# Altium PCB 758721.097-1.PcbDoc
Units mm, origin at the board's own origin, x right, y up, seen from the top; angles counter-clockwise.
Board outline 65 x 20 mm, 2 copper layers (Top Layer, Bottom Layer), stack 1.571 mm thick; 12 components, 3 nets, 21 pads, 0 vias.
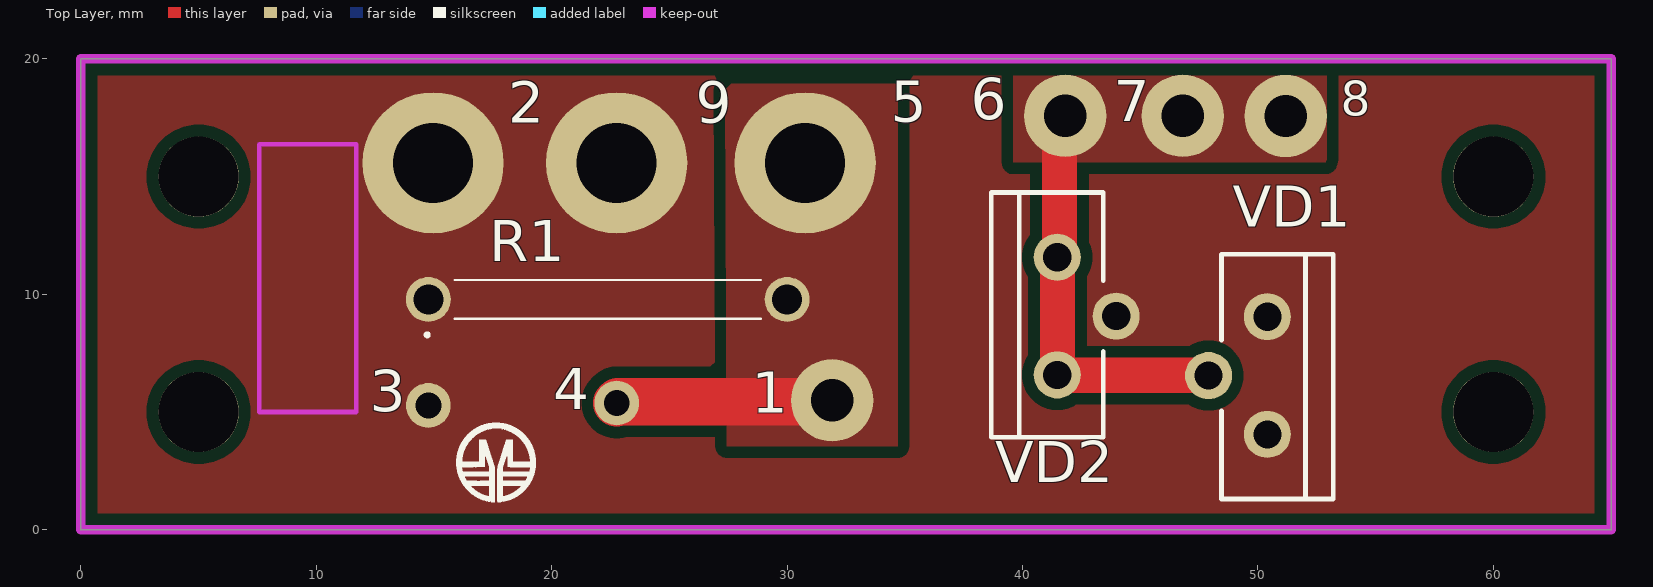
[diagram p0: Top Layer view]
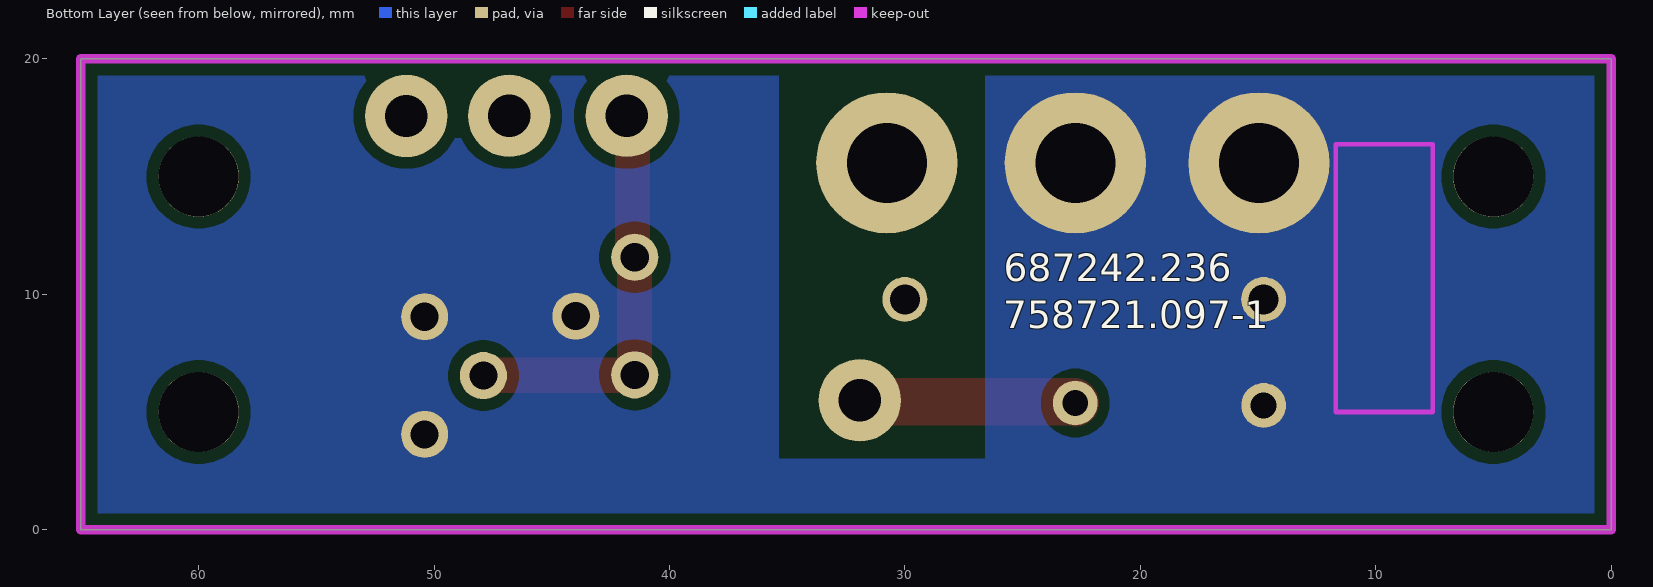
[diagram p1: Bottom Layer view, seen from below]
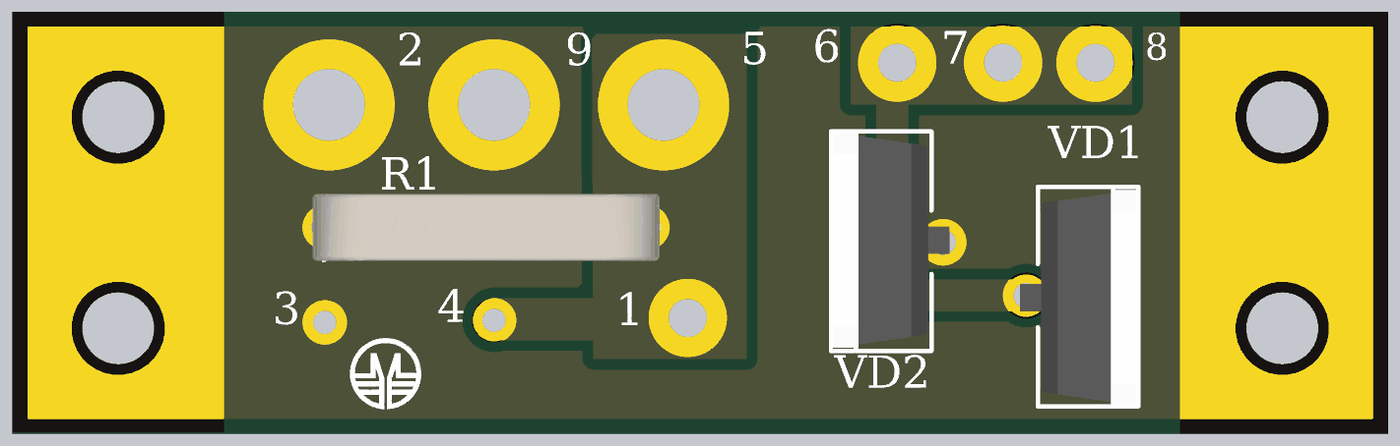
[diagram p2: 3D render of the assembled board from above, using the file's embedded part models]

## Layer stack, top to bottom
Top Solder: solder mask 0.0102, Solder Resist, Dk 3.5
Top Layer: signal copper 0.0356
Dielectric 1: dielectric 1.5, FR-4, Dk 4.8
Bottom Layer: signal copper 0.0356
Bottom Solder: solder mask 0.0102, Solder Resist, Dk 3.5

## Board outline
0,0 65,0 65,20 0,20

## Design rules (kind name [scope] priority, off if disabled: settings)
Clearance Clearance_2 [InNamedPolygon('Main_GND')] p1: gap=0.5 ignorepadtopadclearanceinfootprint=FALSE
Clearance Clearance_1 [InNamedPolygon('Main_GND')] p2: gap=0.5 ignorepadtopadclearanceinfootprint=FALSE
Clearance [All] p3: gap=0.254 ignorepadtopadclearanceinfootprint=FALSE
PolygonConnect PolygonConnect_1 [All vs IsNamedPolygon('Main_GND')] p1: connectstyle=Direct reliefconductorwidth=0.254 reliefentries=4 polygonreliefangle="90 Angle" airgapwidth=0.254
PolygonConnect [All] p2: connectstyle=Relief reliefconductorwidth=0.254 reliefentries=4 polygonreliefangle="90 Angle" airgapwidth=0.254
RoutingVias [All] p1: holewidth=0.711 width=1.27 viastyle="Through Hole" minholewidth=0.711 minwidth=1.27 maxholewidth=0.711 maxwidth=1.27
SolderMaskExpansion [All] p1: expansion=0.102 istentingtop=FALSE
SupplyNets "Schematic Supply Nets" [InNet('GND')] p1: voltage=0.000
Width [All] p1: maxlimit=0.254 minlimit=0.254 preferedwidth=0.254
30 further rules are at their usual default settings.

## Classes and differential pairs
component class УШЯИ.687242.236Э3_1: 1 2 3 4 5 6 7 9 R1 VD1 VD2

## Components (designator, comment, footprint, x,y, rotation, side; value= is the part's Value field where it differs from the comment)
1 "OTV18" OTV18#1 31.91,5.494 r90 top
2 "OTV34" OTV34 14.96,15.581 r90 top
3 "OTV11" OTV11 14.76,5.281 r90 top
4 "OTV11" OTV11 22.76,5.381 r90 top
5 "OTV34" OTV34 30.767,15.581 r90 top
6 "OTV18" OTV18#1 41.81,17.581 r90 top
7 "OTV18" OTV18#2 47.035,17.556 r90 top
8 "OTV18" OTV18#1 51.175,17.575 r90 top
9 "OTV34" OTV34 22.76,15.581 r90 top
R1 "OAR3-R005FI" OAR3 14.76,9.781 r0 top value="0.005 Ом"
VD1 "1N4007" TO-220(F) 50.4,6.55 r270 top
VD2 "1N4007" TO-220(F) 41.475,9.075 r90 top

## Footprints (in the part's own frame and the unit in brackets; to place one, negate y for a bottom-side part, rotate by r counter-clockwise, add the part's x,y. Pads: shape width x height; smd on the part's side, far side on the other; paste and mask are expansions set on the pad)
OAR3 [mm]
  round 1.906 hole 1.271: 1(0,0) 2(15.24,0)
  silkscreen extent -0.1,-1.55 14.12,0.82, body extent -0.57,-1.59 15.81,1.59, height 11.89
OTV11 [mm]
  round 1.9 hole 1.1: 1(0,0)
OTV18#1 [mm]
  round 3.5 hole 1.8: 1(0,0)
OTV18#2 [mm]
  round 3.5 hole 1.8: 1(0.025,0.225)
OTV34 [mm]
  round 6 hole 3.4: 1(0,0)
TO-220(F) [mm] "TO-220 переформованный"
  round 2 hole 1.2: 1(-2.5,0) 2(0,-2.5) 3(2.5,0)
  silkscreen extent -5.15,-1.95 5.25,2.8, body extent -5,-2.8 5.2,2.7, height 22.06

## Part data
R1: library part OAR3-R010FLF, ModelPrint=0402
VD1 VD2: library part 43CTQ100, "High Performance Schottky Rectifier, 2 x 20 A"

## Free pads (board coordinates)
  round 3.4 hole 3.4 unplated: 0(5,5) 0(5,15) 0(60,5) 0(60,15)

## Nets (pads, with @x,y where several pads share a name; then routed paths per layer and width w, separated by ;. In a path a pad name is that pad's centre, name@x,y a point inside that pad or via, vN(x,y) a via of type N, cw(c..) or ccw(c..) an arc to the next point about the centre after c; other vN are vias at no path point)
GND: 2.1 3.1 9.1 R1.1 VD1.1 VD1.3 VD2.2
Net1_1: 1.1 4.1 5.1 R1.2 | length 9.2
  Top Layer w2: 4.1 22.817,5.437 31.854,5.437 1.1
Net6_1: 6.1 7.1 8.1 VD1.2 VD2.1 VD2.3 | length 17.6
  Top Layer w1.5: 6.1 41.571,17.341 41.571,11.671 VD2.3 41.475,11.354 41.485,11.344 41.485,6.806 41.475,6.796 VD2.1 41.487,6.563 47.887,6.563 VD1.2

## Polygon pours and split planes (outlines as drawn)
Net1_1 on Top Layer "Main_GND" (solid, pour order 1): 27.376,18.95 27.375,18.952 27.443,3.55 34.7,3.55 34.7,18.95
GND on Top Layer "Main_GND" (solid, pour order 2): -0.15,20.025 65,20.025 65,-0.025 0.025,-0.025 -0.025,0.025
Net6_1 on Top Layer "Main_GND" (solid, pour order 0): 48.4,15.6 52.915,15.6 52.915,19.575 39.625,19.575 39.6,19.55 39.6,15.6
GND on Bottom Layer "Main_GND" (solid, pour order 3): 26.525,19.979 26.575,19.929 26.575,3.025 35.35,3.025 35.35,19.975 35.375,19.979 65,19.979 65,0 0,0 0.05,20.025 0.096,19.979

## Keep-outs
Keep-Out Layer:
  lines w0.2: 7.575,5 11.7,5 11.7,16.375 7.575,16.375 7.575,5
  lines w0.4: 0,0 0,20 65,20 65,0 0,0

## Silkscreen, mask and mechanical layers (free items; w line width, h text height)
Top Overlay:
  region: 2609 vertices and 6 holes, not listed, extent 15.946,1.166 19.322,4.543
Bottom Overlay:
  text "687242.236" at 25.8,10.175 h2
  text "758721.097-1" at 25.825,8.175 h2
Top Solder:
  region: 0,0.075 10,0.075 10,20.075 0,20.075
  region: 55.175,0 65,0 65,20 55.175,20
Bottom Solder:
  region: 0,0 10,0 10,20 0,20
  region: 55,0 65,0 65,20 55,20
Mechanical 3:
  lines w0.1: 10,0 10,20 ; 49.375,0 49.375,20